# Altium PCB PCB_MainBoard_GPS.PcbDoc
Units mm, origin at the board's own origin, x right, y up, seen from the top; angles counter-clockwise.
Board outline 69.09 x 85.34 mm, 2 copper layers (Top Layer, Bottom Layer); 14 components, 20 nets, 76 pads, 4 vias.
Unrouted connection lines stored in the file: 3.
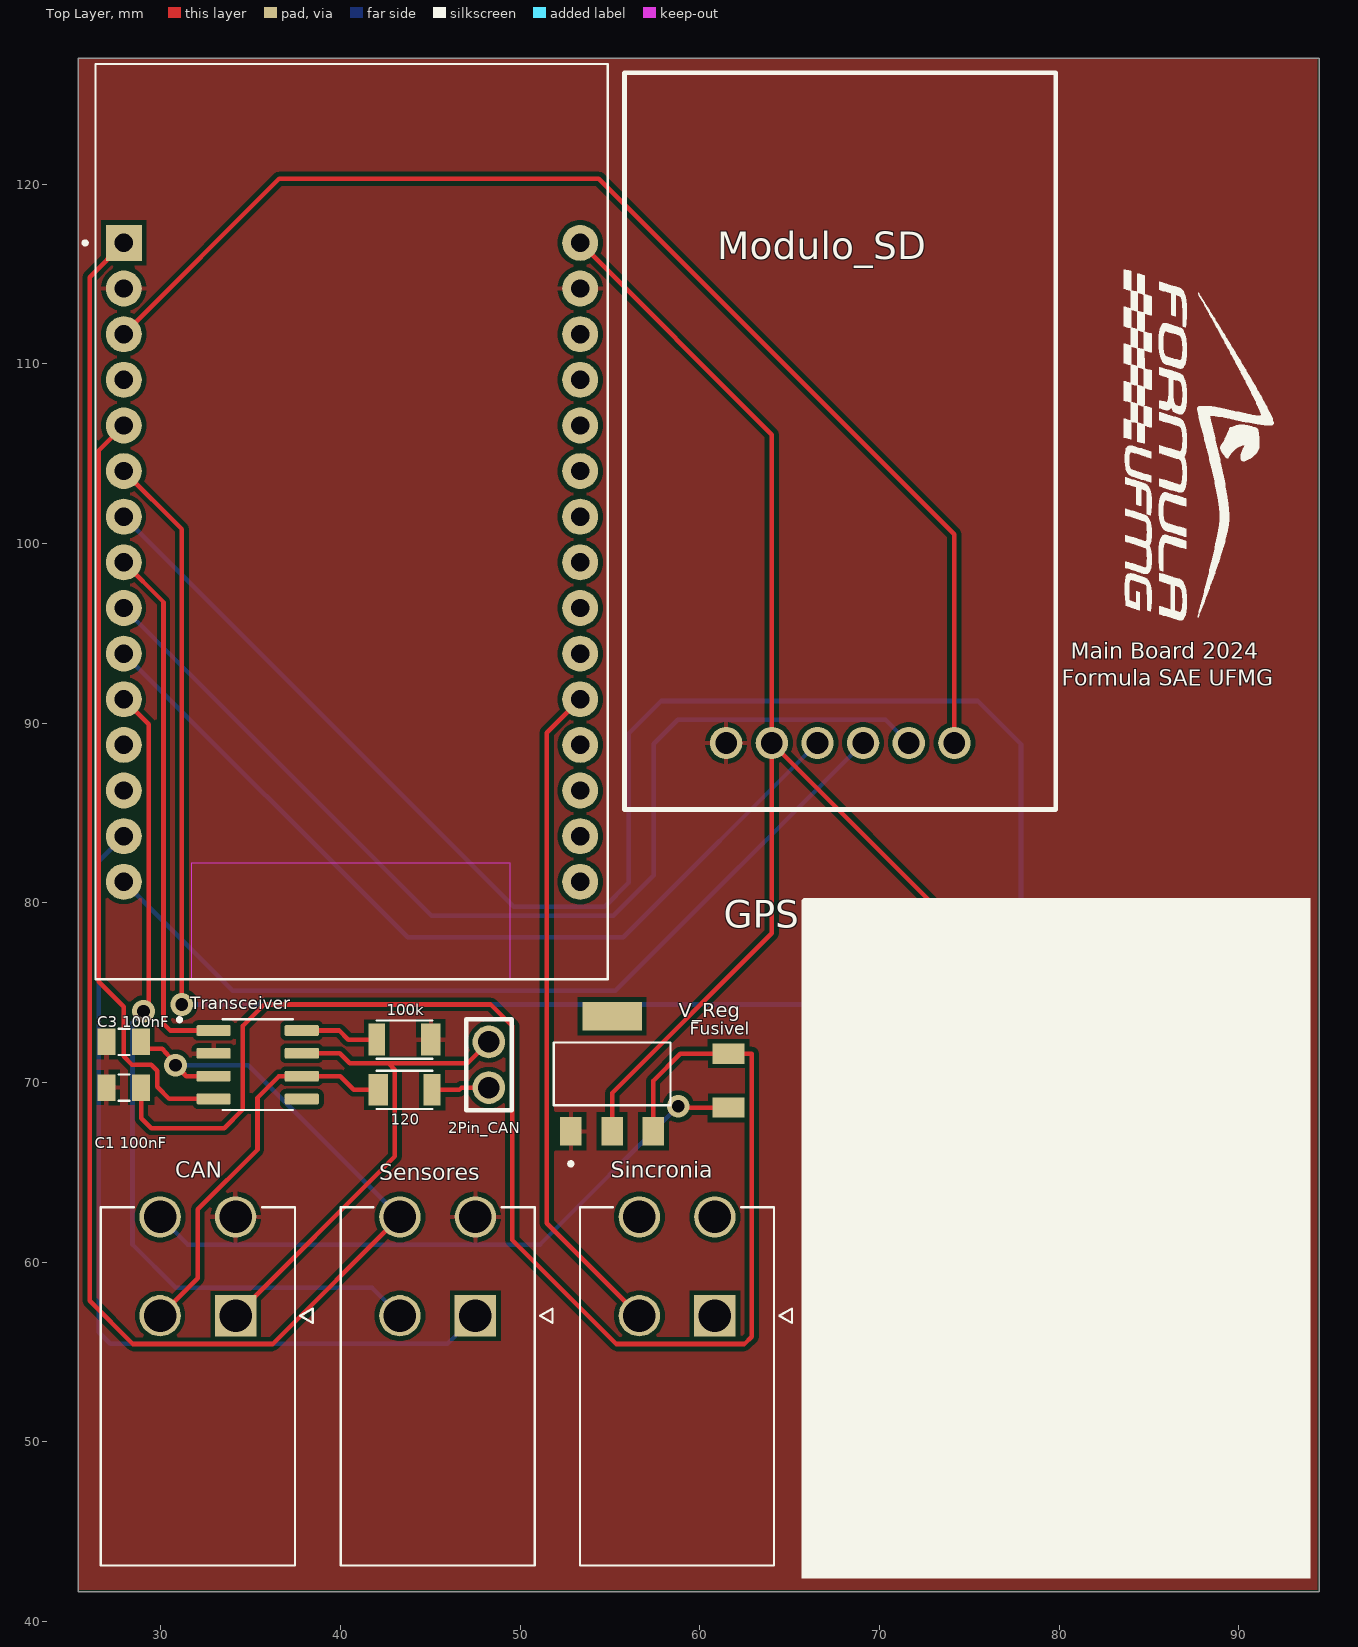
[diagram p0: Top Layer view]
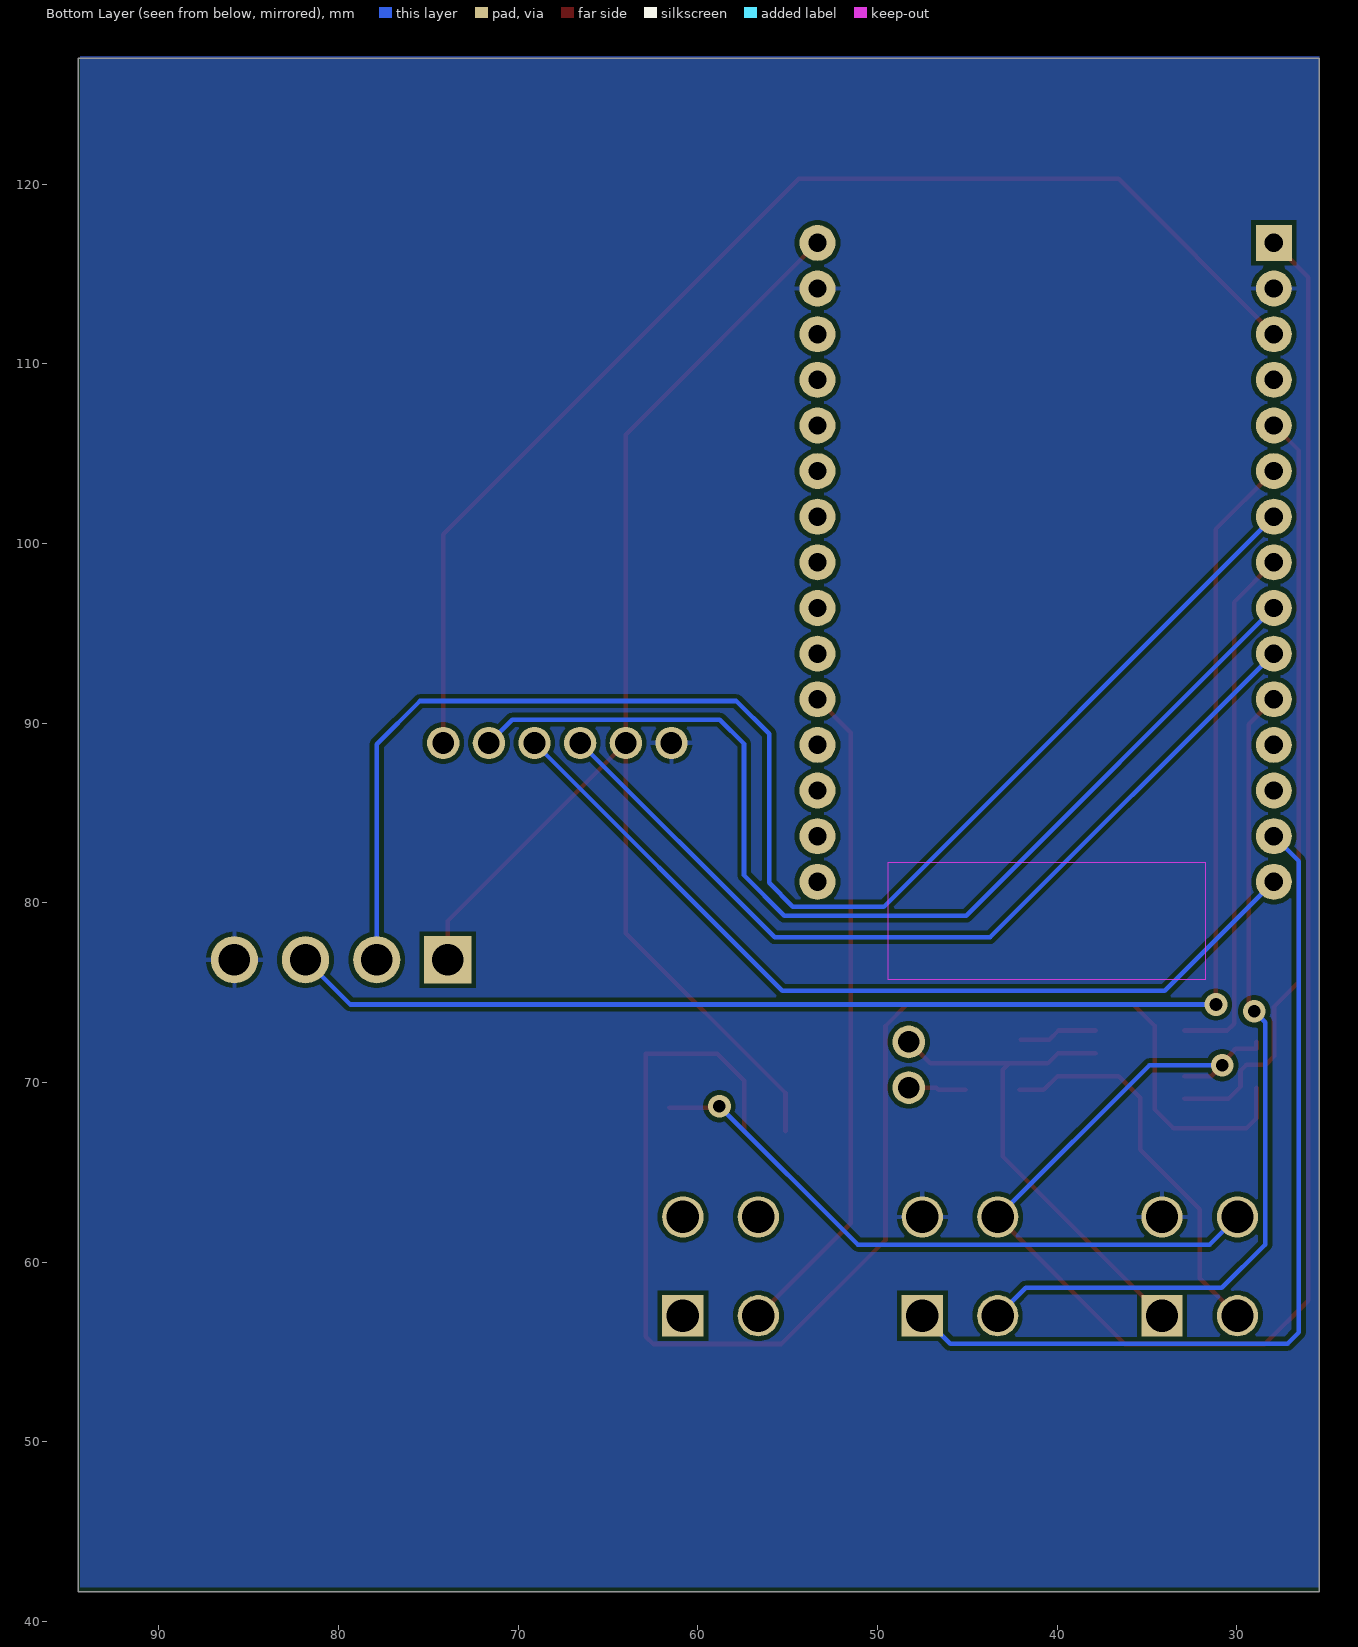
[diagram p1: Bottom Layer view, seen from below]

## Layer stack, top to bottom
Top Solder: solder mask 0.0102, Solder Resist, Dk 3.5
Top Layer: signal copper 0.0356
Dielectric 1: dielectric 0.32, FR-4, Dk 4.8
Bottom Layer: signal copper 0.0356
Bottom Solder: solder mask 0.0102, Solder Resist, Dk 3.5

## Board outline
25.4,41.656 94.488,41.656 94.488,127 25.4,127

## Design rules (kind name [scope] priority, off if disabled: settings)
Clearance [All] p1: gap=0.254 ignorepadtopadclearanceinfootprint=FALSE except(0: Arc-Hole Track-Hole SMDPad-Hole THPad-Hole Via-Hole Fill-Hole Poly-Hole Region-Hole Text-Hole)
PolygonConnect [All] p1: connectstyle=Relief reliefconductorwidth=0.254 reliefentries=4 polygonreliefangle="90 Angle" airgapwidth=0.254
RoutingVias [All] p1: holewidth=0.711 width=1.27 viastyle="Through Hole" minholewidth=0.711 minwidth=1.27 maxholewidth=0.711 maxwidth=1.27
SolderMaskExpansion [All] p1: expansion=0.102 istentingtop=FALSE
Width [All] p1: maxlimit=0.254 minlimit=0.254 preferedwidth=0.254
30 further rules are at their usual default settings.

## Components (designator, comment, footprint, x,y, rotation, side; value= is the part's Value field where it differs from the comment)
2Pin_CAN "2Pin" 2Pin 48.26,69.723 r90 top
100k "CRG1206F620K" RESC3115X65N 43.561,72.39 r180 top
120 "CRG1206F620K" RESC3115X65N 43.561,69.596 r0 top
"C1 100nF" "C2012X5R1E225M085AC" *CAPC2012X100N 27.94,69.723 r180 top
"C3 100nF" "C2012X5R1E225M085AC" *CAPC2012X100N 27.94,72.263 r180 top
CAN "874270402" MOLEX_874270402 34.163,57.023 r0 top (schematic designator MiniFit_CAN)
Fusivel "F1206B3R00FWTR" *FUSM3216X140N 61.595,70.104 r90 top
GPS "FWJ-04-01-T-S" SAMTEC_FWJ-04-01-T-S 79.854,76.835 r0 top
Modulo_SD "Component_1" MICROSD_MODULE 55.808,85.2 r0 top
Sensores "874270402" MOLEX_874270402 47.507,57.023 r0 top (schematic designator MiniFit_Sensores)
Sincronia "874270402" MOLEX_874270402 60.833,57.023 r0 top (schematic designator "MiniFit Sincronia")
Transceiver "MCP2551-E/SN" SOIC127P600X175-8N 35.391,70.993 r0 top (schematic designator Transceiver_CAN)
V_Reg "TS1117BCW50_RPG" VREG_TS1117BCW50_RPG 55.118,70.485 r90 top
? "ESP32-DEVKIT-V1" MODULE_ESP32_DEVKIT_V1 40.64,101.219 r0 top

## Footprints (in the part's own frame and the unit in brackets; to place one, negate y for a bottom-side part, rotate by r counter-clockwise, add the part's x,y. Pads: shape width x height; smd on the part's side, far side on the other; paste and mask are expansions set on the pad)
2Pin [mm]
  round 1.82 hole 1.2: 0(0,0) 1(2.54,0)
  silkscreen extent -1.27,-1.27 3.81,1.27, body extent -1.27,-1.19 3.79,1.27, height 8.54
*CAPC2012X100N [mm]
  rect 0.99x1.47 smd: 1(-0.965,0) 2(0.965,0)
  silkscreen extent -0.3,-0.73 0.3,0.73, body extent -1.05,-0.67 1.05,0.67, height 0.95
*FUSM3216X140N [mil]
  rect 44x71 smd: 1(-59,0) 2(59,0)
MICROSD_MODULE [mm]
  round 1.8 hole 1.2: 0(5.66,3.7) 1(8.2,3.7) 2(10.74,3.7) 3(13.28,3.7) 4(15.82,3.7) 5(18.36,3.7)
  silkscreen extent 0,0 24,41, body extent 0,-4.3 24,41.65, height 6.25
MODULE_ESP32_DEVKIT_V1 [mm]
  rect 2x2 / inner round 2 / far side rect 2x2 hole 1.02: 1(-12.7,15.515)
  round 2 hole 1.02: 2(-12.7,12.975) 3(-12.7,10.435) 4(-12.7,7.895) 5(-12.7,5.355) 6(-12.7,2.815) 7(-12.7,0.275) 8(-12.7,-2.265) 9(-12.7,-4.805) 10(-12.7,-7.345) 11(-12.7,-9.885) 12(-12.7,-12.425) 13(-12.7,-14.965) 14(-12.7,-17.505) 15(-12.7,-20.045) 16(12.7,-20.045) 17(12.7,-17.505) 18(12.7,-14.965) 19(12.7,-12.425) 20(12.7,-9.885) 21(12.7,-7.345) 22(12.7,-4.805) 23(12.7,-2.265) 24(12.7,0.275) 25(12.7,2.815) 26(12.7,5.355) 27(12.7,7.895) 28(12.7,10.435) 29(12.7,12.975) 30(12.7,15.515)
  Keep-Out Layer region: 8.78,-25.475 -8.91,-25.475 -8.91,-18.985 8.78,-18.985
  silkscreen extent -14.95,-25.47 14.23,25.47
MOLEX_874270402 [mm]
  rect 2.3x2.3 hole 1.8 mask+0.076: 1(0,0)
  round 2.3 hole 1.8 mask+0.076: 2(-4.2,0) 3(0,5.5) 4(-4.2,5.5)
  silkscreen extent -7.5,-13.9 4.3,6.04, body extent -7.62,-13.78 3.18,6.16, height 11.4
RESC3115X65N [mm]
  rect 1.09x1.77 smd: 1(-1.465,0)
  rect 0.94x1.77 smd: 2(1.54,0)
  silkscreen extent -1.55,-1.07 1.55,1.07, body extent -1.6,-0.8 1.6,0.8, height 0.55
SAMTEC_FWJ-04-01-T-S [mm]
  rect 2.625x2.625 hole 1.75: 01(-5.94,0)
  round 2.625 hole 1.75: 02(-1.98,0) 03(1.98,0) 04(5.94,0)
  silkscreen extent -8.62,-3.17 7.92,3.17
SOIC127P600X175-8N [mm]
  rrect25% 1.9x0.6 smd: 1(-2.455,1.905) 2(-2.455,0.635) 3(-2.455,-0.635) 4(-2.455,-1.905) 5(2.455,-1.905) 6(2.455,-0.635) 7(2.455,0.635) 8(2.455,1.905)
  silkscreen extent -4.45,-2.53 1.95,2.6, body extent -3,-2.45 3,2.45, height 1.75
VREG_TS1117BCW50_RPG [mm]
  rect 1.6x1.2 smd: 1(-3.2,2.3) 2(-3.2,0) 3(-3.2,-2.3)
  rect 1.6x3.3 smd: 4(3.2,0)
  silkscreen extent -5.1,-3.25 1.75,3.25, body extent -3.5,-3.25 3.5,3.25, height 1.9

## Part data
100k 120: "Res Thick Film 1206 620K Ohm 1% 0.25W_1/4W_ Â±100ppm/C Pad SMD T/R", Package="1206 TE Connectivity", Availability=Unavailable, MF="TE Connectivity", MP=CRG1206F620K, Price="0.00 USD", SnapEDA_Link=https://www.snapeda.com/parts/CRG1206F620K/TE%20Connectivity%20/%20DEUTSCH/view-part/?ref=snap
"C1 100nF" "C3 100nF": "Cap Ceramic 2.2uF 25V X5R 20% SMD 0805 85Â°C Punched Paper T/R", Package="0805 TDK", Availability=Unavailable, MF=TDK, MP=C2012X5R1E225M085AC, Price=None, SnapEDA_Link=https://www.snapeda.com/parts/C2012X5R1E225M085AC/TDK/view-part/?ref=snap
CAN Sensores Sincronia: "Conn Wire to Board HDR 4 POS 4.2mm Solder RA Side Entry Thru-Hole Mini-Fit Jrâ„¢ Tray", Package=None, Availability="In Stock", Check_prices=https://www.snapeda.com/parts/874270402/Molex/view-part/?ref=eda, MF=Molex, MP=874270402, Price=None, Purchase-URL=https://pricing.snapeda.com/search/part/874270402/?ref=eda, SnapEDA_Link=https://www.snapeda.com/parts/874270402/Molex/view-part/?ref=snap
Fusivel: "F1206B Series Fast Acting 63 V 3 A 1206 Surface Mount Thin-Film Fuse T&R", Package="1206 AVX", Availability=Unavailable, MF=AVX, MP=F1206B3R00FWTR, Price=None, SnapEDA_Link=https://www.snapeda.com/parts/F1206B3R00FWTR/AVX%20/%20Kyocera/view-part/?ref=snap
GPS: "Connector Header Through Hole 4 position 0.156 (3.96mm)", Package=None, Availability=Bad, Check_prices=https://www.snapeda.com/parts/FWJ-04-01-T-S/Samtec/view-part/3573755/?ref=eda, MF=Samtec, MP=FWJ-04-01-T-S, Price=None, Purchase-URL=https://pricing.snapeda.com/search/part/FWJ-04-01-T-S/?ref=eda, SnapEDA_Link=https://www.snapeda.com/parts/FWJ-04-01-T-S/Samtec/view-part/3573755/?ref=snap
Transceiver: "1/1 Transceiver Half CANbus 8-SOIC", Package="SOIC-8 Microchip", Availability="In Stock", Check_prices=https://www.snapeda.com/parts/MCP2551-E/SN/Microchip/view-part/?ref=eda, MF=Microchip, MP=MCP2551-E/SN, Price=None, Purchase-URL=https://pricing.snapeda.com/search/part/MCP2551-E/SN/?ref=eda, SnapEDA_Link=https://www.snapeda.com/parts/MCP2551-E/SN/Microchip/view-part/?ref=snap
V_Reg: "1A 5V LOW DROPOUT VOLTAGE REGULATOR", Package="SOT-223 Taiwan Semiconductor", Availability="In Stock", Check_prices=https://www.snapeda.com/parts/TS1117BCW50%20RPG/Taiwan+Semiconductor/view-part/?ref=eda, MF="Taiwan Semiconductor", MP="TS1117BCW50 RPG", Price=None, Purchase-URL="https://pricing.snapeda.com/search/part/TS1117BCW50 RPG/?ref=eda", SnapEDA_Link=https://www.snapeda.com/parts/TS1117BCW50%20RPG/Taiwan+Semiconductor/view-part/?ref=snap
?: "Dual core, Wi-Fi: 2.4 GHz up to 150 Mbits/s,BLE (Bluetooth Low Energy) and legacy Bluetooth, 32 bits, Up to 240 MHz", Package=None, Availability="Not in stock", Check_prices=https://www.snapeda.com/parts/ESP32-DEVKIT-V1/Do+it/view-part/?ref=eda, MF="Do it", MP=ESP32-DEVKIT-V1, Price=None, SnapEDA_Link=https://www.snapeda.com/parts/ESP32-DEVKIT-V1/Do+it/view-part/?ref=snap

## Via types
v1: diameter 1.27, hole 0.711, Top Layer to Bottom Layer, 4 vias

## Nets (pads, with @x,y where several pads share a name; then routed paths per layer and width w, separated by ;. In a path a pad name is that pad's centre, name@x,y a point inside that pad or via, vN(x,y) a via of type N, cw(c..) or ccw(c..) an arc to the next point about the centre after c; other vN are vias at no path point)
GND: 100k.1 "C1 100nF.2" "C3 100nF.2" ?.2 ?.29 CAN.3 GPS.04 Modulo_SD.0 Sensores.3 Transceiver.2 V_Reg.1
Net2Pin_CAN_0: 2Pin_CAN.0 120.2 | length 3.2
  Top Layer w0.254: 120.2 46.609,69.596 46.736,69.723 2Pin_CAN.0
Net2Pin_CAN_1: 2Pin_CAN.1 CAN.1 Transceiver.7 | length 29
  Top Layer w0.254: CAN.1 43.028,65.888 43.028,70.714 42.672,71.069 ; Transceiver.7 39.954,71.628 40.513,71.069 42.672,71.069 ; 2Pin_CAN.1 47.066,71.069 42.672,71.069
Net100k_2: 100k.2 Transceiver.8 | length 4.4
  Top Layer w0.254: Transceiver.8 39.929,72.898 40.437,72.39 100k.2
Net120_1: 120.1 CAN.2 Transceiver.6 | length 21.9
  Top Layer w0.254: CAN.2 32.055,59.115 32.055,62.941 35.382,66.269 35.382,69.164 36.576,70.358 Transceiver.6 39.98,70.358 40.742,69.596 120.1
Net_1: "C3 100nF.1" ?.1 Sensores.4 Transceiver.3 | length 102.8
  Top Layer w0.254: ?.1 26.035,114.829 26.035,57.861 28.448,55.448 36.232,55.448 Sensores.4 ; 28.905,72.263 28.905,71.882 30.074,71.882 30.85,71.003 31.42,70.358 ; v1(30.81,70.968) 31.42,70.358 ; Transceiver.3 31.42,70.358
  Bottom Layer w0.254: v1(30.81,70.968) 34.862,70.968 Sensores.4
Net_3: ?.3 Modulo_SD.5 | length 69.6
  Top Layer w0.254: ?.3 36.58,120.294 54.381,120.294 74.168,100.508 Modulo_SD.5
Net_5: ?.5 Transceiver.4 | length 42.8
  Top Layer w0.254: ?.5 26.543,105.177 26.543,75.616 27.931,74.227 27.931,71.459 28.397,70.993 29.464,70.993 29.794,70.663 29.794,69.767 30.473,69.088 Transceiver.4
Net_6: ?.6 GPS.03 | length 82.7
  Top Layer w0.254: ?.6 31.166,100.808 v1(31.166,74.346)
  Bottom Layer w0.254: v1(31.166,74.346) 79.345,74.346 GPS.03
Net_7: ?.7 GPS.02 | length 81.5
  Bottom Layer w0.254: ?.7 49.641,79.793 54.712,79.793 56.032,81.114 56.032,89.408 57.861,91.237 75.463,91.237 77.874,88.826 GPS.02
Net_8: ?.8 Transceiver.1 | length 29.5
  Top Layer w0.254: ?.8 30.15,96.744 30.15,73.279 30.531,72.898 Transceiver.1
Net_9: ?.9 Modulo_SD.4 | length 60.1
  Bottom Layer w0.254: ?.9 45.069,79.285 55.18,79.285 57.429,81.534 57.429,88.849 58.776,90.195 70.333,90.195 Modulo_SD.4
Net_10: ?.10 Modulo_SD.2 | length 49.6
  Bottom Layer w0.254: ?.10 43.734,78.08 55.728,78.08 Modulo_SD.2
Net_11: ?.11 Sensores.2 | length 47.8
  Top Layer w0.254: ?.11 29.337,89.937 29.337,74.27 v1(29.032,73.965)
  Bottom Layer w0.254: v1(29.032,73.965) 28.423,73.355 28.423,60.985 30.836,58.572 41.758,58.572 Sensores.2
Net_14: ?.14 Sensores.1 | length 50.1
  Bottom Layer w0.254: ?.14 26.543,82.317 26.543,56.109 27.178,55.474 45.958,55.474 Sensores.1
Net_15: ?.15 Modulo_SD.3 | length 49.4
  Bottom Layer w0.254: ?.15 34.006,75.108 55.296,75.108 Modulo_SD.3
Net_20: ?.20 Sincronia.2 | length 37.2
  Top Layer w0.254: ?.20 51.486,89.48 51.486,62.17 Sincronia.2
Net_30: ?.30 GPS.01 Modulo_SD.1 V_Reg.2 | length 73.7
  Top Layer w0.254: ?.30 64.008,106.066 Modulo_SD.1 ; V_Reg.2 55.118,69.418 64.008,78.308 Modulo_SD.1 ; GPS.01 73.914,78.994 Modulo_SD.1
"NetC1 100nF_1": "C1 100nF.1" Fusivel.2 V_Reg.3 | length 81.1
  Top Layer w0.254: 28.905,69.723 28.905,68.021 29.464,67.462 33.528,67.462 34.569,68.504 34.569,73.152 35.763,74.346 48.362,74.346 49.555,73.152 49.555,61.239 55.347,55.448 62.484,55.448 62.89,55.855 62.89,71.603 Fusivel.2 58.917,71.603 57.418,70.104 V_Reg.3
NetFusivel_1: CAN.4 Fusivel.1 | length 35.5
  Top Layer w0.254: v1(58.801,68.682) 58.877,68.605 Fusivel.1
  Bottom Layer w0.254: CAN.4 31.501,60.985 51.105,60.985 v1(58.801,68.682)
pads on no net: ?.4 ?.12 ?.13 ?.16 ?.17 ?.18 ?.19 ?.21 ?.22 ?.23 ?.24 ?.25 ?.26 ?.27 ?.28 Sincronia.1 Sincronia.3 Sincronia.4 Transceiver.5 V_Reg.4

## Polygon pours and split planes (outlines as drawn)
GND on Top Layer "GND_Top" (solid, pour order 3): 25.4,127 25.4,41.783 94.361,41.783 94.361,80.391 94.361,127
no net on Top Overlay "c" (solid, pour order 0): 65.786,80.264 65.659,80.137 65.659,42.418 93.98,42.418 93.98,80.264
GND on Bottom Layer "GND_Bottom" (solid, pour order 4): 25.4,127.127 25.4,41.91 94.361,41.91 94.361,80.518 94.361,127.127

## Silkscreen, mask and mechanical layers (free items; w line width, h text height)
Top Overlay:
  drawing of 1863 lines, arcs and shapes, not listed
  text "Main Board 2024" at 80.645,93.599 h0.9
  text "Formula SAE UFMG" at 80.137,92.075 h0.9